# Altium PCB INC-HBAUDIT88.PcbDoc
Units mm, origin at the board's own origin, x right, y up, seen from the top; angles counter-clockwise.
Board outline 244.7 x 214.2 mm, 2 copper layers (Top Layer, Bottom Layer); 48 components, 10 nets, 102 pads, 52 vias.
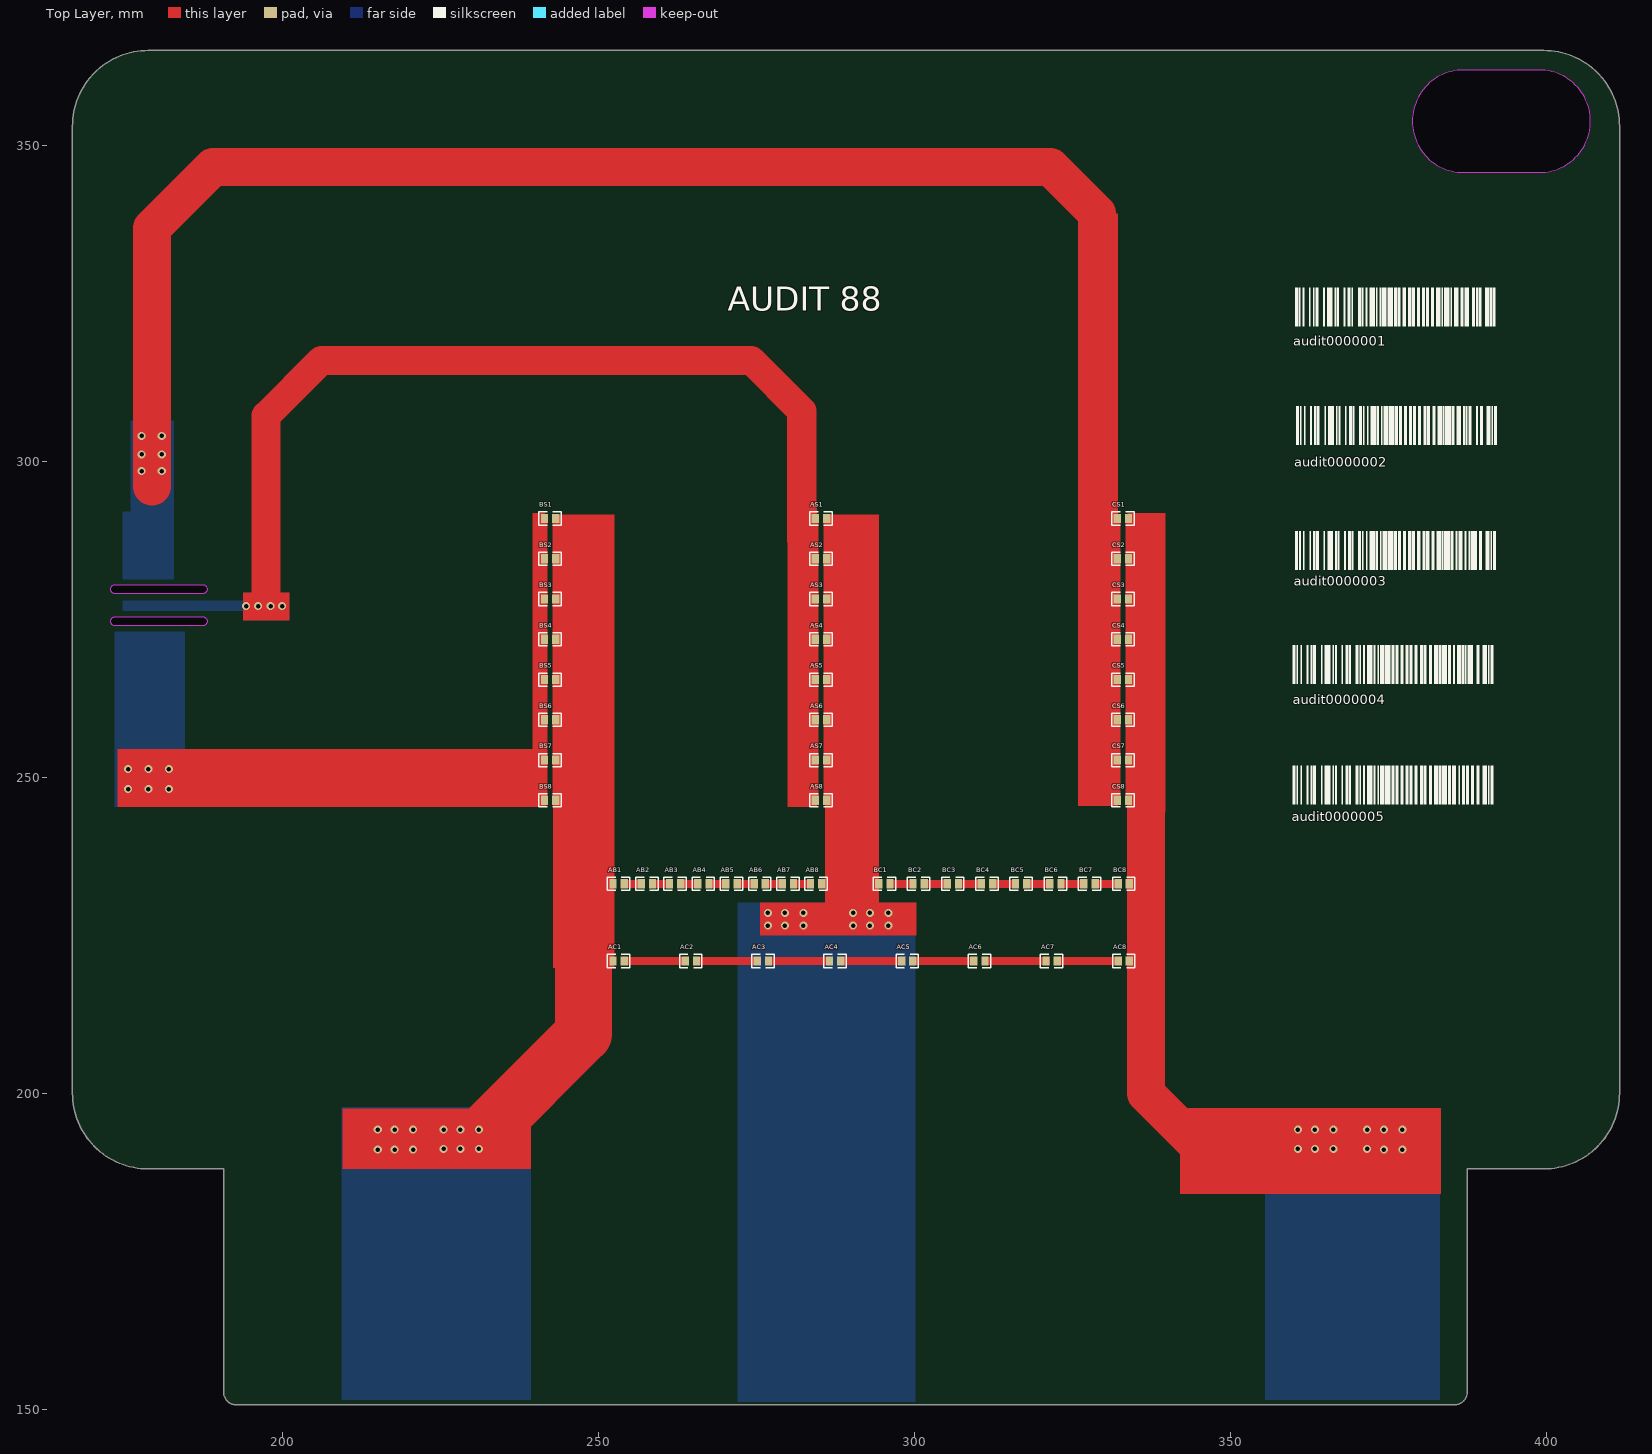
[diagram p0: Top Layer view]
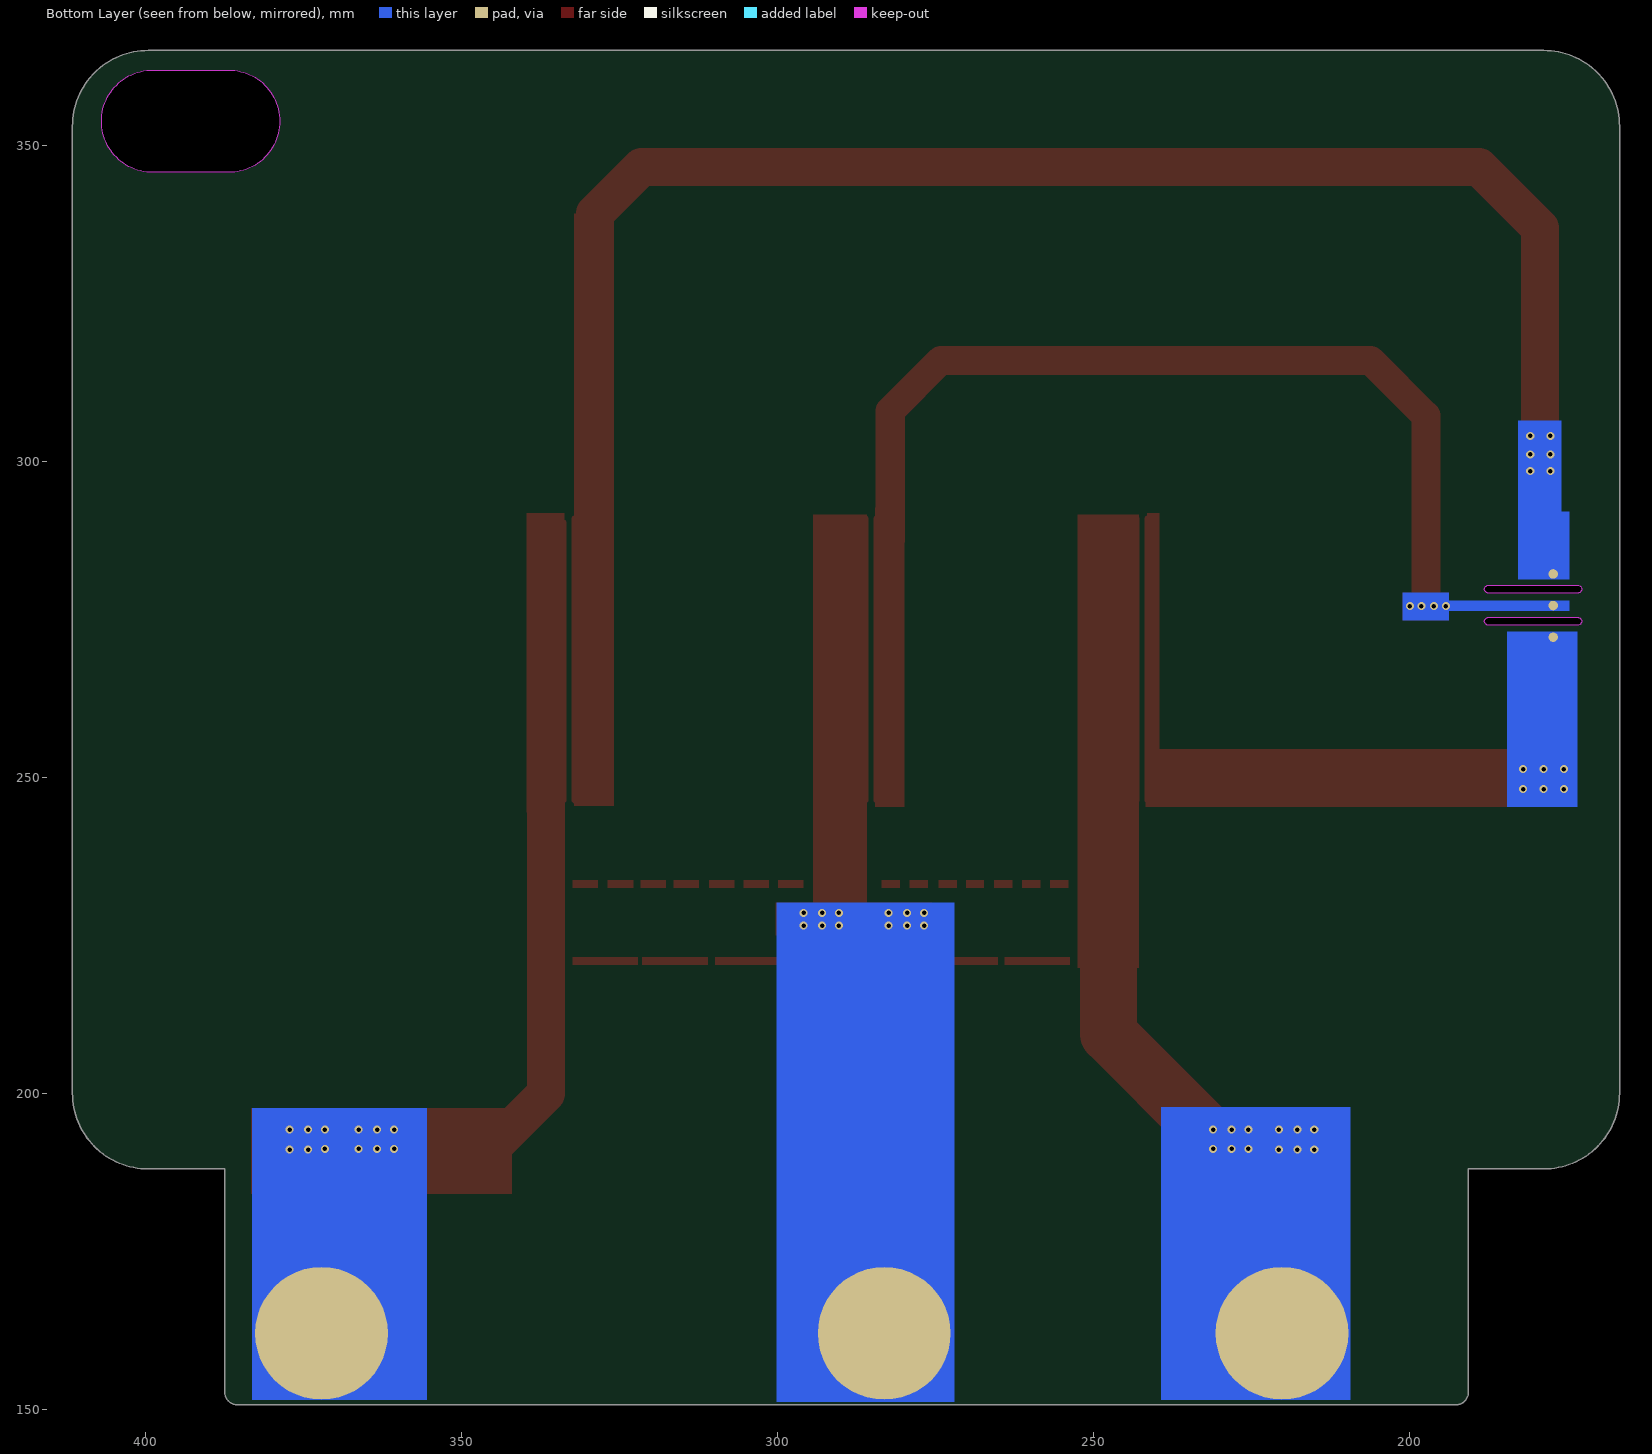
[diagram p1: Bottom Layer view, seen from below]
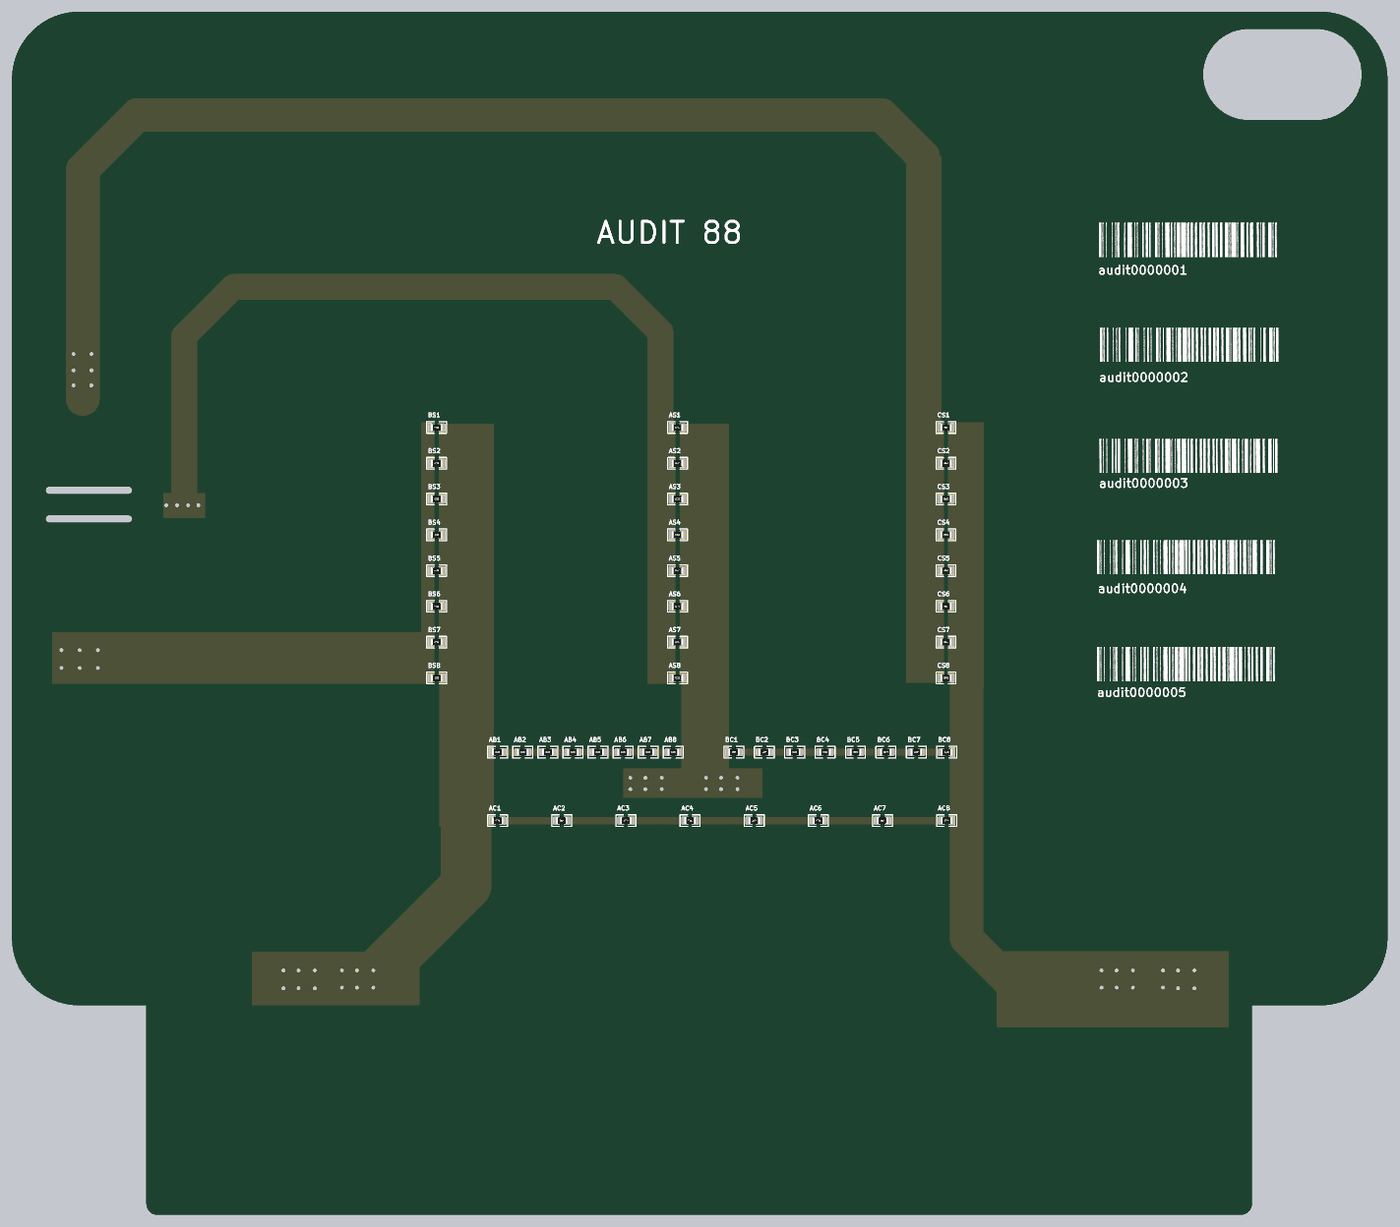
[diagram p2: 3D render of the assembled board from above, using the file's embedded part models]

## Layer stack, top to bottom
Top Solder: solder mask 0.0102, Solder Resist, Dk 3.5
Top Layer: signal copper 0.0356
Dielectric 1: dielectric 0.32, FR-4, Dk 4.8
Bottom Layer: signal copper 0.0356
Bottom Solder: solder mask 0.0102, Solder Resist, Dk 3.5

## Board outline
190.747,152.791 190.747,188.091 178.847,188.091 cw(c178.847,200.091) 166.847,200.091 166.847,352.991 cw(c178.847,352.991) 178.847,364.991 399.547,364.991 cw(c399.547,352.991) 411.547,352.991 411.547,200.091 cw(c399.547,200.091) 399.547,188.091 387.447,188.091 387.447,152.791 cw(c385.447,152.791) 385.447,150.791 192.747,150.791 cw(c192.747,152.791)
cut-out: 173.482,279.146 187.579,279.146 ccw(c187.579,279.781) 187.579,280.416 173.482,280.416 ccw(c173.482,279.781)
cut-out: 173.482,274.066 187.579,274.066 ccw(c187.579,274.701) 187.579,275.336 173.482,275.336 ccw(c173.482,274.701)
cut-out: 386.847,345.691 398.847,345.691 ccw(c398.847,353.791) 398.847,361.891 386.847,361.891 ccw(c386.847,353.791)

## Design rules (kind name [scope] priority, off if disabled: settings)
Clearance [All] p1 off: gap=0.254 ignorepadtopadclearanceinfootprint=FALSE
PolygonConnect [All] p1: connectstyle=Relief reliefconductorwidth=0.254 reliefentries=4 polygonreliefangle="90 Angle" airgapwidth=0.254
RoutingVias [All] p1: holewidth=0.711 width=1.27 viastyle="Through Hole" minholewidth=0.711 minwidth=1.27 maxholewidth=0.711 maxwidth=1.27
ShortCircuit [All] p1 off: allowed=TRUE
SolderMaskExpansion [All] p1: expansion=0.102
Width [All] p1: maxlimit=12.7 minlimit=0.254 preferedwidth=0.305
29 further rules are at their usual default settings.

## Components (designator, comment, footprint, x,y, rotation, side; value= is the part's Value field where it differs from the comment)
AB1 "Comment" 0805_R 253.238,233.172 r0 top
AB2 "Comment" 0805_R 257.701,233.172 r0 top
AB3 "Comment" 0805_R 262.164,233.172 r0 top
AB4 "Comment" 0805_R 266.627,233.172 r0 top
AB5 "Comment" 0805_R 271.09,233.172 r0 top
AB6 "Comment" 0805_R 275.553,233.172 r0 top
AB7 "Comment" 0805_R 280.016,233.172 r0 top
AB8 "Comment" 0805_R 284.479,233.172 r0 top
AC1 "Comment" 0805_R 253.238,220.98 r0 top
AC2 "Comment" 0805_R 264.65,220.98 r0 top
AC3 "Comment" 0805_R 276.062,220.98 r0 top
AC4 "Comment" 0805_R 287.474,220.98 r0 top
AC5 "Comment" 0805_R 298.885,220.98 r0 top
AC6 "Comment" 0805_R 310.297,220.98 r0 top
AC7 "Comment" 0805_R 321.709,220.98 r0 top
AC8 "Comment" 0805_R 333.121,220.98 r0 top
AS1 "Comment" 0805_R 285.241,290.957 r0 top
AS2 "Comment" 0805_R 285.241,284.589 r0 top
AS3 "Comment" 0805_R 285.241,278.221 r0 top
AS4 "Comment" 0805_R 285.241,271.853 r0 top
AS5 "Comment" 0805_R 285.241,265.484 r0 top
AS6 "Comment" 0805_R 285.241,259.116 r0 top
AS7 "Comment" 0805_R 285.241,252.748 r0 top
AS8 "Comment" 0805_R 285.241,246.38 r0 top
BC1 "Comment" 0805_R 295.276,233.172 r0 top
BC2 "Comment" 0805_R 300.682,233.172 r0 top
BC3 "Comment" 0805_R 306.089,233.172 r0 top
BC4 "Comment" 0805_R 311.495,233.172 r0 top
BC5 "Comment" 0805_R 316.902,233.172 r0 top
BC6 "Comment" 0805_R 322.308,233.172 r0 top
BC7 "Comment" 0805_R 327.715,233.172 r0 top
BC8 "Comment" 0805_R 333.121,233.172 r0 top
BS1 "Comment" 0805_R 242.389,290.957 r0 top
BS2 "Comment" 0805_R 242.389,284.589 r0 top
BS3 "Comment" 0805_R 242.389,278.221 r0 top
BS4 "Comment" 0805_R 242.389,271.853 r0 top
BS5 "Comment" 0805_R 242.389,265.484 r0 top
BS6 "Comment" 0805_R 242.389,259.116 r0 top
BS7 "Comment" 0805_R 242.389,252.748 r0 top
BS8 "Comment" 0805_R 242.389,246.38 r0 top
CS1 "Comment" 0805_R 332.995,290.957 r0 top
CS2 "Comment" 0805_R 332.995,284.589 r0 top
CS3 "Comment" 0805_R 332.995,278.221 r0 top
CS4 "Comment" 0805_R 332.995,271.853 r0 top
CS5 "Comment" 0805_R 332.995,265.484 r0 top
CS6 "Comment" 0805_R 332.995,259.116 r0 top
CS7 "Comment" 0805_R 332.995,252.748 r0 top
CS8 "Comment" 0805_R 332.995,246.38 r0 top

## Footprints (in the part's own frame and the unit in brackets; to place one, negate y for a bottom-side part, rotate by r counter-clockwise, add the part's x,y. Pads: shape width x height; smd on the part's side, far side on the other; paste and mask are expansions set on the pad)
0805_R [mm]
  rect 1.16x1.47 smd: 1(-0.89,0) 2(0.89,0)
  silkscreen extent -1.77,-1.04 1.77,1.03, body extent -1,-0.62 1,0.63, height 0.49

## Free pads (board coordinates)
  round 1.5 smd far side: 1(177.347,272.191) 2(177.347,277.191) 3(177.347,282.191)
  round 21 smd far side: 1(220.247,162.091) 2(283.147,162.091) 3(372.147,162.091)

## Via types
v1: diameter 1.27, hole 0.711, Top Layer to Bottom Layer, tented both sides, 52 vias

## Nets (pads, with @x,y where several pads share a name; then routed paths per layer and width w, separated by ;. In a path a pad name is that pad's centre, name@x,y a point inside that pad or via, vN(x,y) a via of type N, cw(c..) or ccw(c..) an arc to the next point about the centre after c; other vN are vias at no path point)
A: BS1.1 BS2.1 BS3.1 BS4.1 BS5.1 BS6.1 BS7.1 BS8.1 pad.1@177.347,272.191 | length 44.6
  Top Layer w1.016: BS8.1 BS7.1 BS6.1 BS5.1 BS4.1 BS3.1 BS2.1 BS1.1
  other v1: 175.641,248.158 178.879,248.158 182.118,248.158 175.641,251.333 178.879,251.333 182.118,251.333
A1: BS1.2 BS2.2 BS3.2 BS4.2 BS5.2 BS6.2 BS7.2 BS8.2 pad.1@220.247,162.091 | length 85
  Top Layer w1.016: BS8.2 BS7.2 BS6.2 BS5.2 BS4.2 BS3.2 BS2.2 BS1.2
  Top Layer w8: 247.65,222.123 248.031,227.711 248.285,227.965
  Top Layer w9: 232.283,194.056 247.65,209.423 247.65,222.123
  other v1: 215.138,191.135 217.805,191.135 220.726,191.135 225.552,191.262 228.219,191.262 231.14,191.262 215.138,194.31 217.805,194.31 220.726,194.31 225.552,194.31 228.219,194.31 231.14,194.31
AB1: 
AB2: 
AB3: 
AB4: 
B: AS1.1 AS2.1 AS3.1 AS4.1 AS5.1 AS6.1 AS7.1 AS8.1 pad.2@177.347,277.191 | length 185.6
  Top Layer w1.016: AS8.1 AS7.1 AS6.1 AS5.1 AS4.1 AS3.1 AS2.1 AS1.1
  Top Layer w4.6: 197.485,278.257 197.485,307.213 206.248,315.976 274.193,315.976 282.194,307.975 282.194,287.528
  other v1: 196.215,277.114
B1: AS1.2 AS2.2 AS3.2 AS4.2 AS5.2 AS6.2 AS7.2 AS8.2 pad.2@283.147,162.091 | length 45.9
  Top Layer w1.016: AS8.2 AS7.2 AS6.2 AS5.2 AS4.2 AS3.2 AS2.2 AS1.2
  Bottom Layer w7.62: pad.2@282.194,163.044 pad.2@283.147,162.091
  other v1: 276.86,226.568 279.527,226.568 282.448,226.568 290.322,226.568 292.989,226.568 295.91,226.568 276.86,228.6 279.527,228.6 282.448,228.6 290.322,228.6 292.989,228.6 295.91,228.6
C: CS1.1 CS2.1 CS3.1 CS4.1 CS5.1 CS6.1 CS7.1 CS8.1 pad.3@177.347,282.191 | length 250.5
  Top Layer w1.016: CS8.1 CS7.1 CS6.1 CS5.1 CS4.1 CS3.1 CS2.1 CS1.1
  Top Layer w6: 179.451,296.037 179.451,336.931 189.103,346.583 321.564,346.583 328.93,339.217 328.93,330.708
  other v1: 180.975,298.45
C1: CS1.2 CS2.2 CS3.2 CS4.2 CS5.2 CS6.2 CS7.2 CS8.2 pad.3@372.147,162.091 | length 122
  Top Layer w1.016: CS8.2 CS7.2 CS6.2 CS5.2 CS4.2 CS3.2 CS2.2 CS1.2@333.885,290.322
  Top Layer w6: 336.677,249.174 336.677,200.025 344.805,191.897 348.869,191.897 349.123,191.643 ; 363.347,191.897 374.269,191.897 376.301,191.897
  other v1: 374.269,191.135 377.19,191.135 360.68,191.262 363.347,191.262 366.268,191.262 371.602,191.262 360.68,194.31 363.347,194.31 366.268,194.31 371.602,194.31 374.269,194.31 377.19,194.31
pads on no net: AB1.1 AB1.2 AB2.1 AB2.2 AB3.1 AB3.2 AB4.1 AB4.2 AB5.1 AB5.2 AB6.1 AB6.2 AB7.1 AB7.2 AB8.1 AB8.2 AC1.1 AC1.2 AC2.1 AC2.2 AC3.1 AC3.2 AC4.1 AC4.2 AC5.1 AC5.2 AC6.1 AC6.2 AC7.1 AC7.2 AC8.1 AC8.2 BC1.1 BC1.2 BC2.1 BC2.2 BC3.1 BC3.2 BC4.1 BC4.2 BC5.1 BC5.2 BC6.1 BC6.2 BC7.1 BC7.2 BC8.1 BC8.2
copper on no net:
  other v1: 194.31,277.114 198.183,277.114 200.025,277.114 177.8,298.45 177.8,301.117 180.975,301.117 177.8,304.038 180.975,304.038

## Other copper
Top Layer:
  rectangle net B1: 275.59,225.044 300.355,230.251
  rectangle net A: 239.649,251.587 241.554,291.846
  rectangle net B1: 285.877,225.044 294.386,291.592
  rectangle net B: 279.908,245.364 284.607,292.735
  rectangle net B: 193.802,274.828 201.168,279.273
  rectangle net C: 325.882,245.491 332.232,339.217
  rectangle net C1: 333.756,244.475 339.725,291.846
  rectangle net A1: 242.824,219.837 252.603,291.592
  rectangle net A: 173.99,245.364 241.808,254.508
  rectangle net C1: 342.011,184.15 383.286,197.739
  rectangle net A1: 209.55,188.087 239.395,197.612
  rectangle: 253.746,220.345 264.16,221.615
  rectangle: 265.176,220.345 275.59,221.615
  rectangle: 276.606,220.345 287.02,221.615
  rectangle: 288.036,220.345 298.45,221.615
  rectangle: 299.466,220.345 309.88,221.615
  rectangle: 311.023,220.345 321.437,221.615
  rectangle: 322.072,220.345 332.486,221.615
  rectangle: 254,232.537 256.921,233.807
  rectangle: 258.445,232.537 261.366,233.807
  rectangle: 262.89,232.537 265.811,233.807
  rectangle: 267.335,232.537 270.256,233.807
  rectangle: 271.653,232.537 274.574,233.807
  rectangle: 276.225,232.537 279.146,233.807
  rectangle: 280.67,232.537 283.591,233.807
  rectangle: 295.91,232.537 299.974,233.807
  rectangle: 301.371,232.537 305.435,233.807
  rectangle: 306.832,232.537 310.896,233.807
  rectangle: 312.42,232.537 316.484,233.807
  rectangle: 317.627,232.537 321.691,233.807
  rectangle: 322.834,232.537 326.898,233.807
  rectangle: 328.422,232.537 332.486,233.807
Bottom Layer:
  rectangle net B: 193.802,274.828 201.168,279.273
  rectangle net B: 189.992,276.352 201.168,278.003
  rectangle net B: 174.752,276.352 195.58,278.003
  rectangle net C: 174.752,281.305 182.88,292.1
  rectangle net C: 176.022,281.432 182.88,306.451
  rectangle net A: 173.482,245.364 184.658,273.05
  rectangle net C1: 355.473,151.511 383.159,197.739
  rectangle net B1: 272.034,151.257 300.228,230.251
  rectangle net A1: 209.423,151.511 239.395,197.866

## Silkscreen, mask and mechanical layers (free items; w line width, h text height)
Top Overlay:
  drawing of 215 lines, arcs and shapes, not listed
  text "AUDIT 88" at 270.51,323.85 h3.81
  text "audit0000001" at 359.918,318.262 h1.52
  text "audit0000002" at 360.07,299.161 h1.52
  text "audit0000003" at 360.045,280.314 h1.52
  text "audit0000004" at 359.842,261.569 h1.52
  text "audit0000005" at 359.689,243.078 h1.52
Bottom Solder:
  rectangle: 174.752,269.875 180.213,273.05
  rectangle: 174.752,276.352 180.213,278.003
  rectangle: 174.752,281.305 180.213,284.48
  rectangle: 357.632,151.638 383.159,180.467
  rectangle: 272.161,151.384 297.688,180.213
  rectangle: 209.55,151.384 235.077,180.213
  lines w7.62: 368.427,165.608 369.062,165.608
Mechanical 1:
  lines w0.013: 166.847,200.091 ccw(c178.847,200.091) 178.847,188.091 190.747,188.091 190.747,152.791 ccw(c192.747,152.791) 192.747,150.791 385.447,150.791 ccw(c385.447,152.791) 387.447,152.791 387.447,188.091 399.547,188.091 ccw(c399.547,200.091) 411.547,200.091 411.547,352.991 ccw(c399.547,352.991) 399.547,364.991 178.847,364.991 ccw(c178.847,352.991) 166.847,352.991 166.847,200.091 ; 386.847,345.691 cw(c386.847,353.791) 386.847,361.891 398.847,361.891 cw(c398.847,353.791) 398.847,345.691 386.847,345.691
  lines w0.203: 173.482,274.066 cw(c173.482,274.701) 173.482,275.336 187.579,275.336 cw(c187.579,274.701) 187.579,274.066 173.482,274.066 ; 173.482,279.146 cw(c173.482,279.781) 173.482,280.416 187.579,280.416 cw(c187.579,279.781) 187.579,279.146 173.482,279.146